# Altium PCB IRIS1-DLB3.PcbDoc
Units mil, origin at the board's own origin, x right, y up, seen from the top; angles counter-clockwise.
Board outline 3540 x 3540 mil, 4 copper layers (Top Layer, PWR, GND, Bottom Layer), stack 61.418 mil thick; 50 components, 39 nets, 446 pads, 182 vias.
Unrouted connection lines stored in the file: 9.
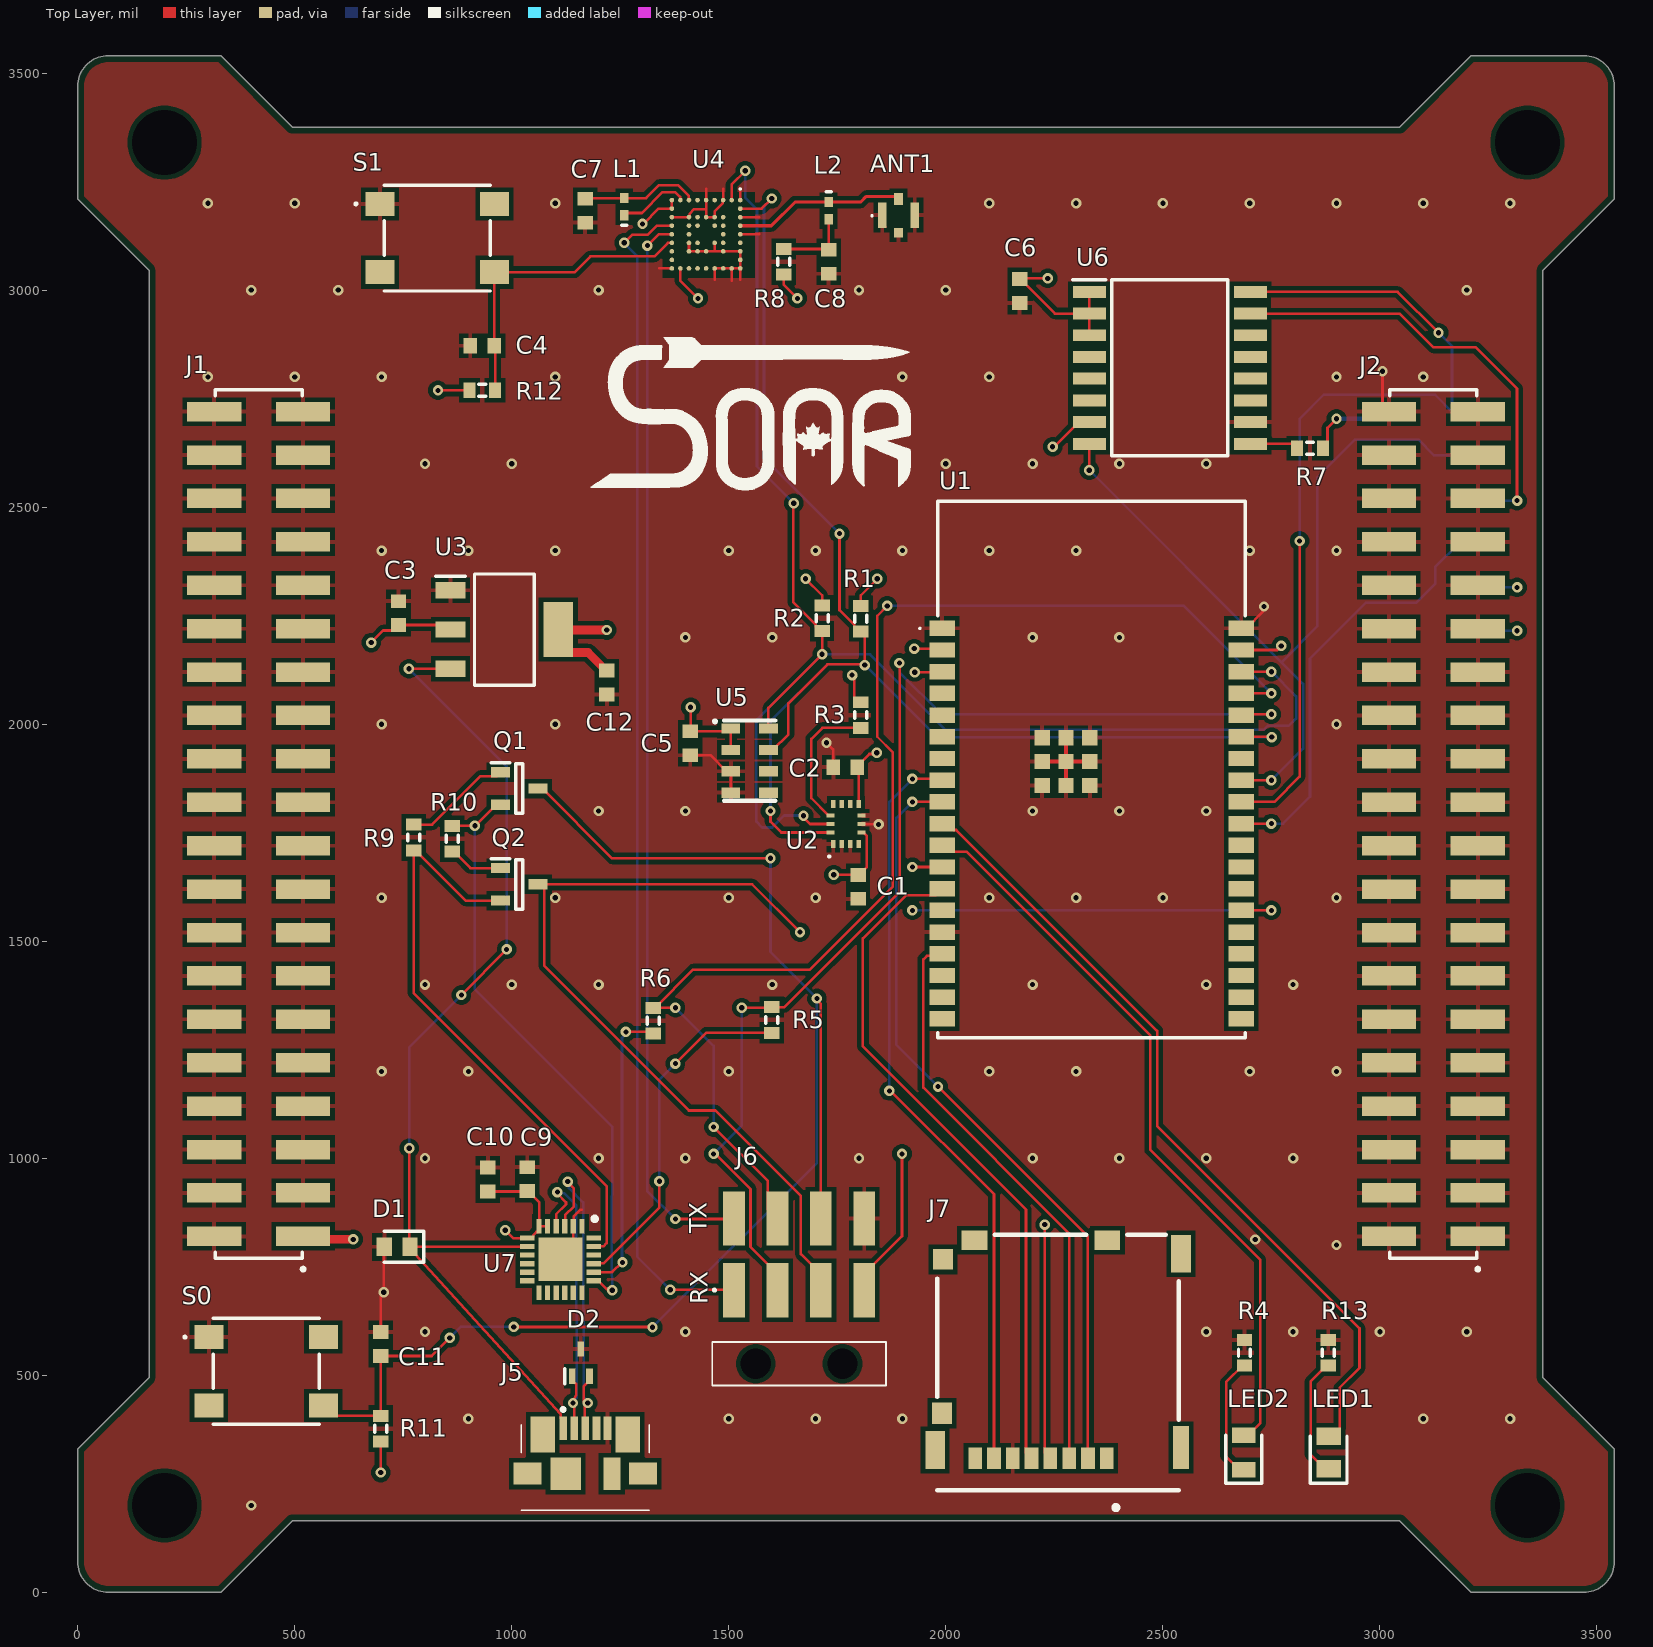
[diagram p0: Top Layer view]
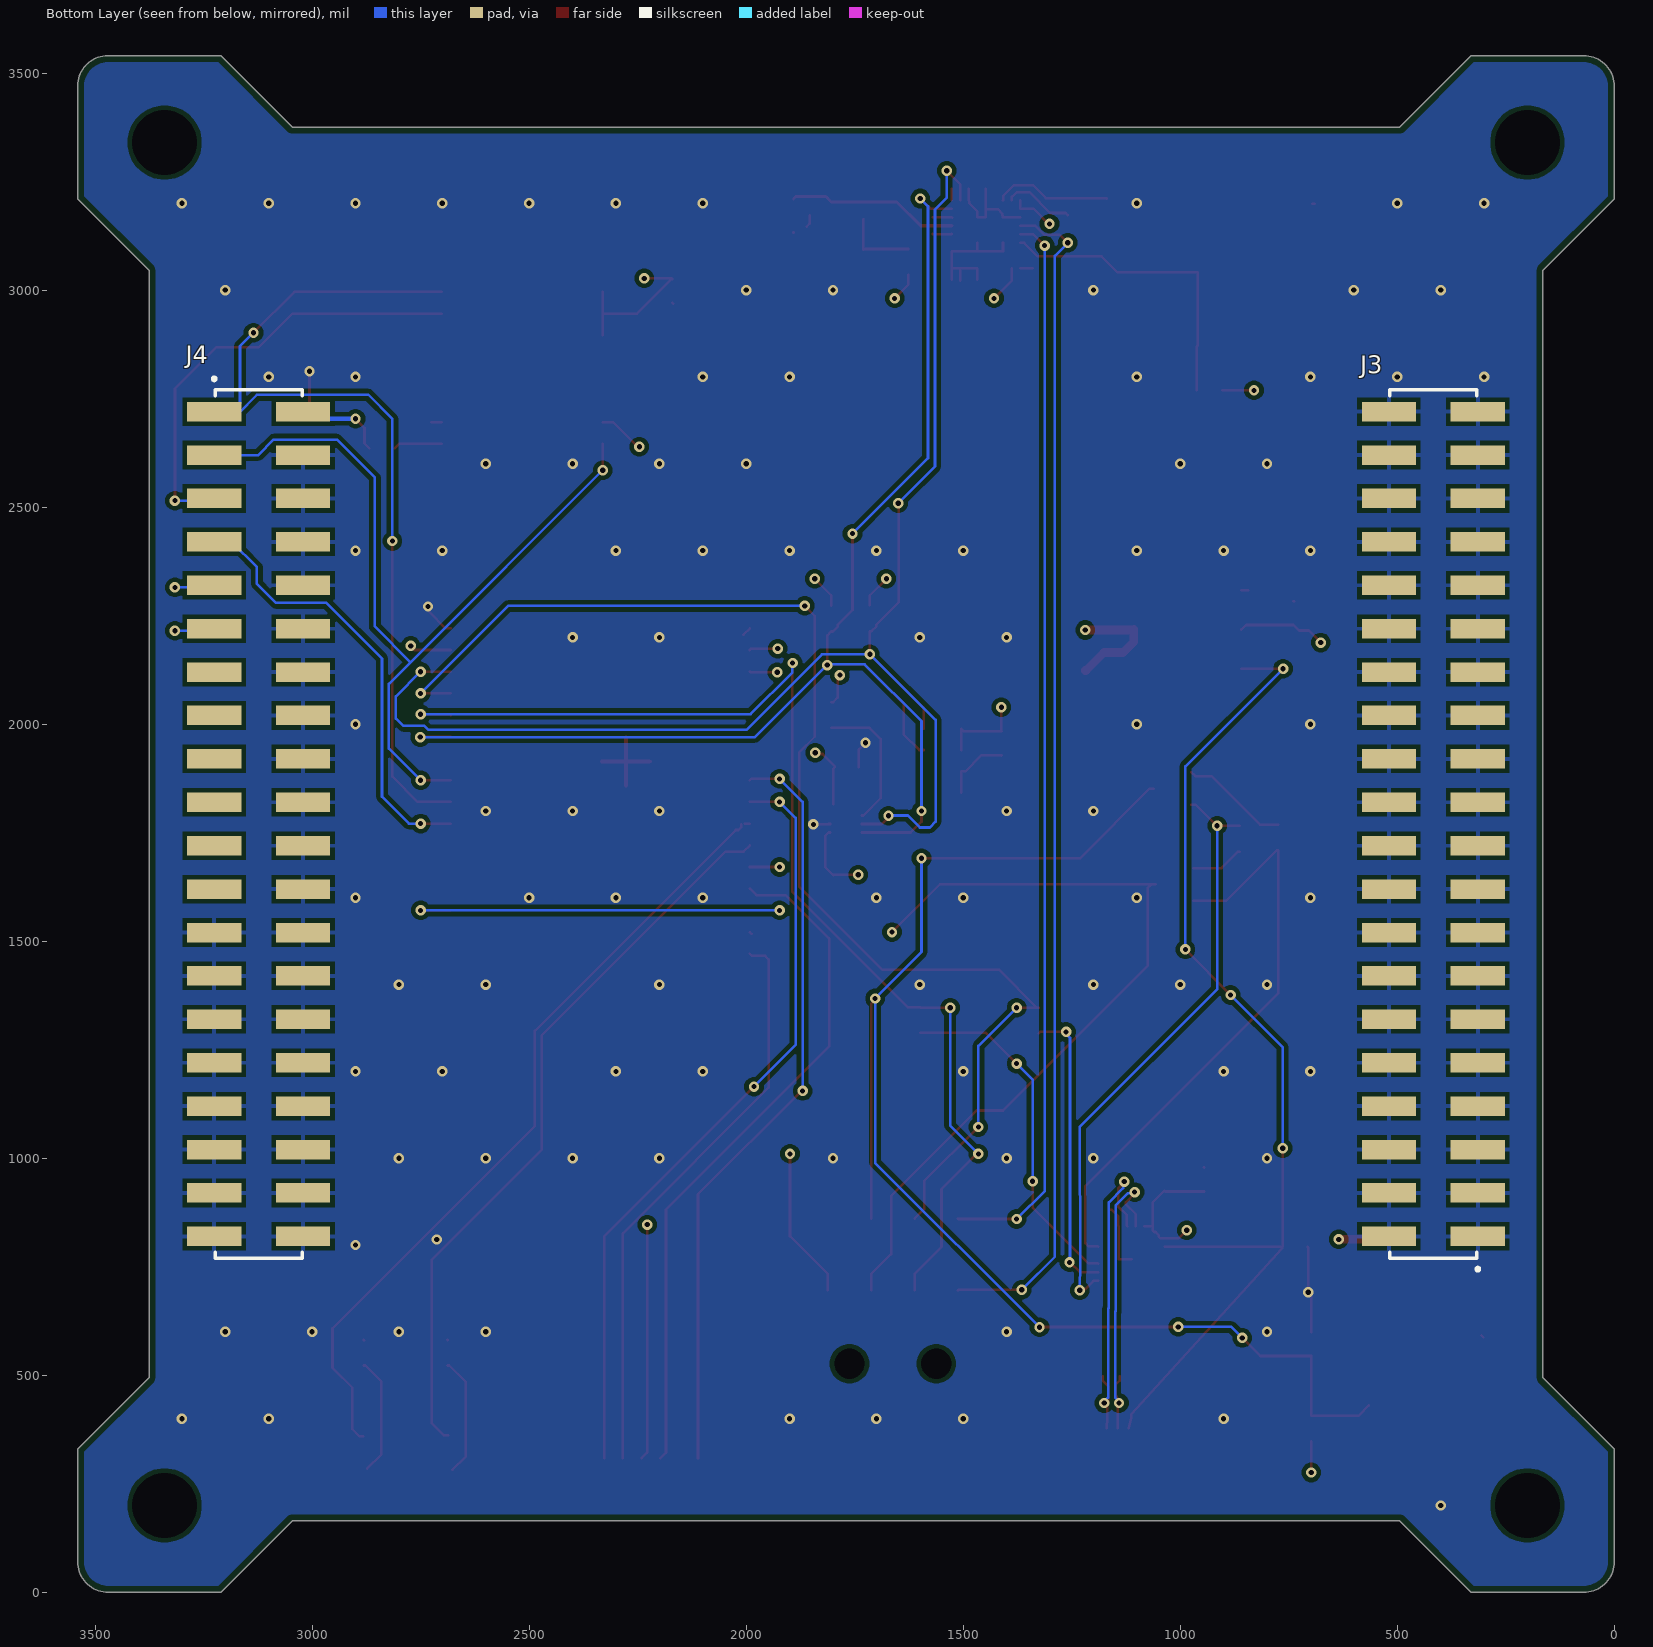
[diagram p1: Bottom Layer view, seen from below]
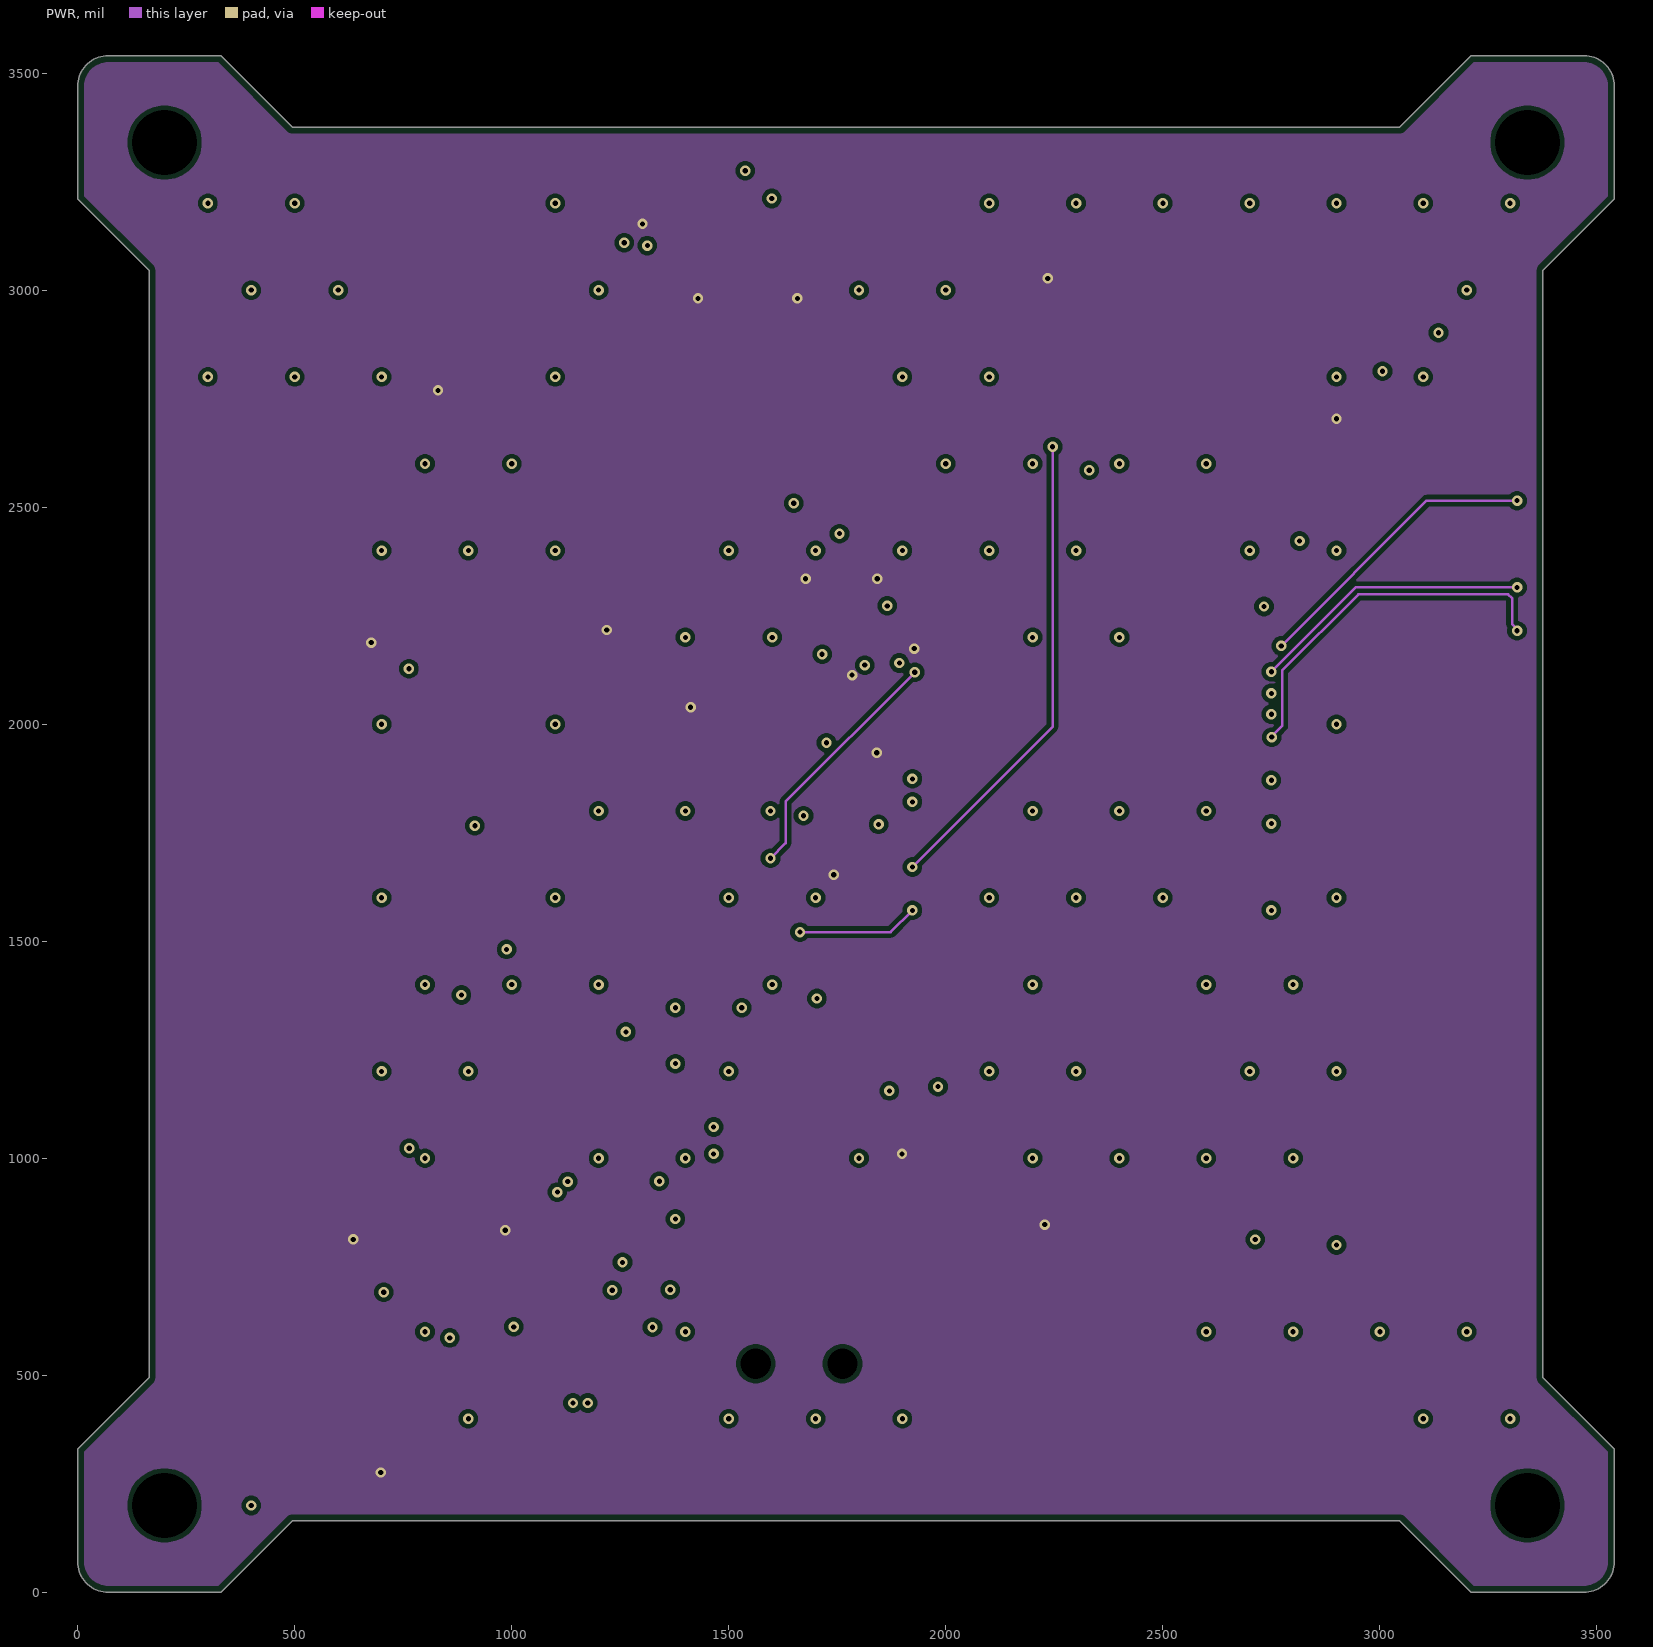
[diagram p2: PWR]
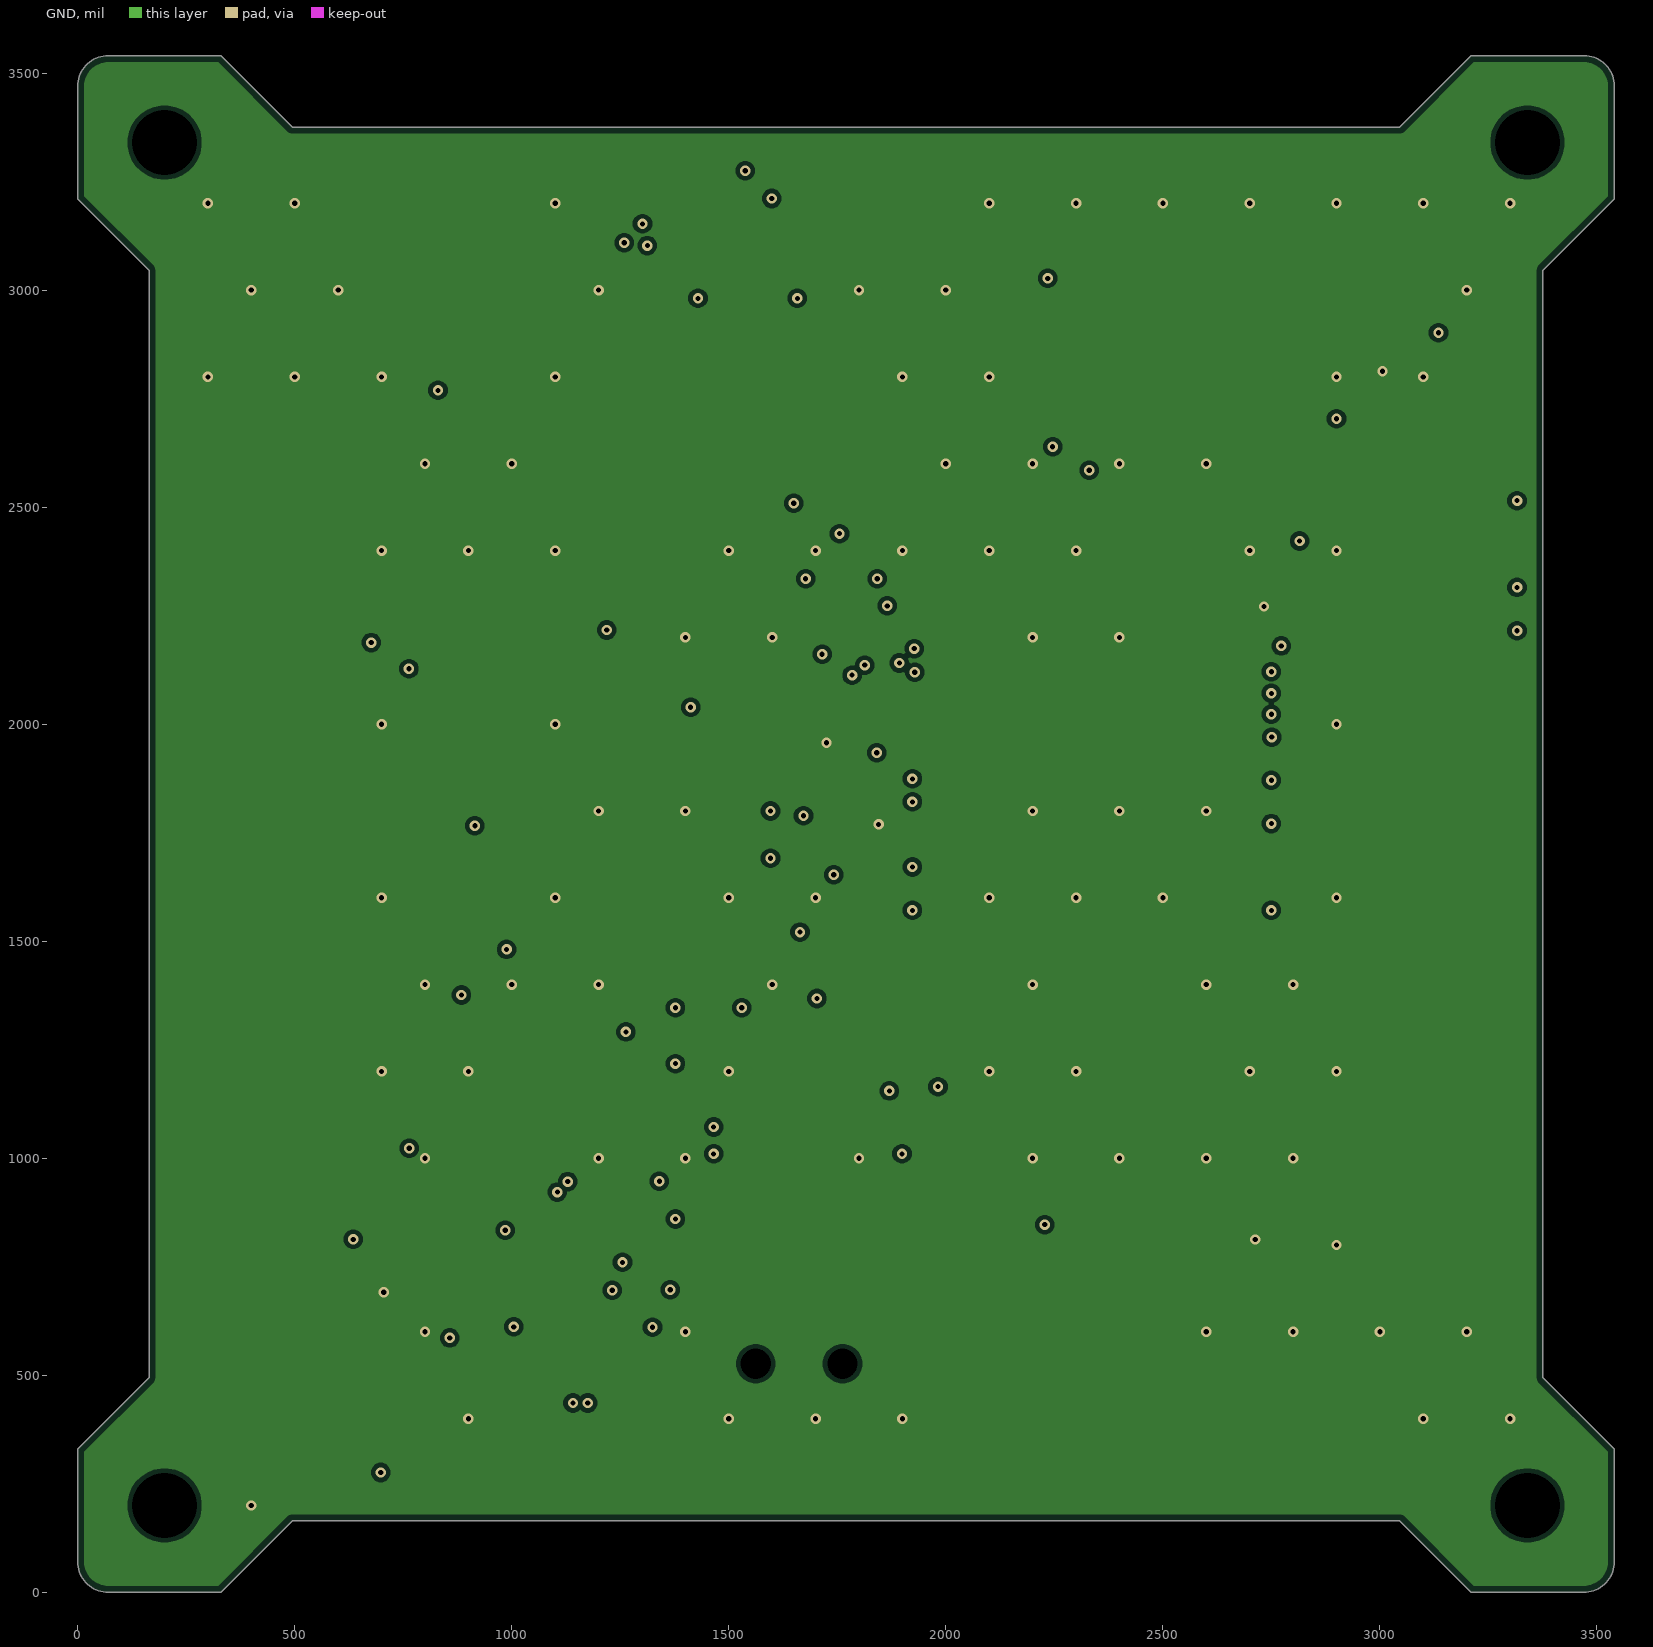
[diagram p3: GND]

## Layer stack, top to bottom
Top Solder: solder mask 0.4, Solder Resist, Dk 3.5
Top Layer: signal copper 1.378
Dielectric 2: prepreg 4.3307, PP-006, Dk 4.29
PWR: signal copper 1.378
Dielectric 1: core 47.2441, FR-4, Dk 4.6
GND: signal copper 1.378
Dielectric 3: prepreg 4.3307, PP-006, Dk 4.29
Bottom Layer: signal copper 1.378
Bottom Solder: solder mask 0.4, Solder Resist, Dk 3.5

## Board outline
0,3470 cw(c70,3470) 70,3540 330,3540 495,3375 3045,3375 3210,3540 3471,3540 cw(c3471,3471) 3540,3471 3540,3210 3375,3045 3375,495 3540,330 3540,70 cw(c3470,70) 3470,0 3210,0 3045,165 495,165 330,0 70,0 cw(c70,70) 0,70 0,330 165,495 165,3045 0,3210

## Design rules (kind name [scope] priority, off if disabled: settings)
BoardOutlineClearance [All] p1: gap=15 ignorepadtopadclearanceinfootprint=FALSE
Clearance [All] p1: gap=10 ignorepadtopadclearanceinfootprint=TRUE except(0: Arc-Hole Track-Hole SMDPad-Hole THPad-Hole Via-Hole Fill-Hole Poly-Hole Region-Hole Text-Hole)
DiffPairsRouting [All] p1: maxlimit=20 minlimit=10 mostfreqgap=10 toplayer_minwidth=6 toplayer_maxwidth=15 toplayer_prefwidth=15 midlayer1_minwidth=6 midlayer1_maxwidth=15 midlayer1_prefwidth=15 midlayer2_minwidth=6 midlayer2_maxwidth=15 midlayer2_prefwidth=15 bottomlayer_minwidth=6 bottomlayer_maxwidth=15 bottomlayer_prefwidth=15 maxuncoupledlength=500
HoleSize [All] p1: absolutevalues=TRUE maxlimit=200 minlimit=12 maxpercent=80.000 minpercent=20.000
MinimumSolderMaskSliver [All] p1: minsoldermaskwidth=5
PolygonConnect PolygonConnect_8 [All vs IsNamedPolygon('Bottom_GND')] p1: thpad.connectstyle=Relief thpad.reliefconductorwidth=10 thpad.reliefentries=4 thpad.polygonreliefangle="90 Angle" thpad.airgapwidth=10 smdpad.connectstyle=Relief smdpad.reliefconductorwidth=10 smdpad.reliefentries=4 smdpad.polygonreliefangle="90 Angle" smdpad.airgapwidth=10 via.connectstyle=Direct via.reliefconductorwidth=10 via.reliefentries=4 via.polygonreliefangle="90 Angle" via.airgapwidth=10
PolygonConnect PolygonConnect_7 [All vs IsNamedPolygon('GND_L03_P003')] p2: thpad.connectstyle=Relief thpad.reliefconductorwidth=10 thpad.reliefentries=4 thpad.polygonreliefangle="90 Angle" thpad.airgapwidth=10 smdpad.connectstyle=Relief smdpad.reliefconductorwidth=10 smdpad.reliefentries=4 smdpad.polygonreliefangle="90 Angle" smdpad.airgapwidth=10 via.connectstyle=Direct via.reliefconductorwidth=10 via.reliefentries=4 via.polygonreliefangle="90 Angle" via.airgapwidth=10
PolygonConnect PolygonConnect_6 [All vs IsNamedPolygon('3V3_PWR')] p3: thpad.connectstyle=Relief thpad.reliefconductorwidth=10 thpad.reliefentries=4 thpad.polygonreliefangle="90 Angle" thpad.airgapwidth=10 smdpad.connectstyle=Relief smdpad.reliefconductorwidth=10 smdpad.reliefentries=4 smdpad.polygonreliefangle="90 Angle" smdpad.airgapwidth=10 via.connectstyle=Direct via.reliefconductorwidth=10 via.reliefentries=4 via.polygonreliefangle="90 Angle" via.airgapwidth=10
PolygonConnect PolygonConnect_5 [All vs IsNamedPolygon('Top_GND')] p4: thpad.connectstyle=Direct thpad.reliefconductorwidth=10 thpad.reliefentries=4 thpad.polygonreliefangle="90 Angle" thpad.airgapwidth=10 smdpad.connectstyle=Relief smdpad.reliefconductorwidth=10 smdpad.reliefentries=4 smdpad.polygonreliefangle="90 Angle" smdpad.airgapwidth=10 via.connectstyle=Direct via.reliefconductorwidth=10 via.reliefentries=4 via.polygonreliefangle="45 Angle" via.airgapwidth=10
PolygonConnect PolygonConnect_4 [All vs IsNamedPolygon('Bottom_GND')] p5: thpad.connectstyle=Direct thpad.reliefconductorwidth=10 thpad.reliefentries=4 thpad.polygonreliefangle="90 Angle" thpad.airgapwidth=10 smdpad.connectstyle=Relief smdpad.reliefconductorwidth=10 smdpad.reliefentries=4 smdpad.polygonreliefangle="90 Angle" smdpad.airgapwidth=10 via.connectstyle=Relief via.reliefconductorwidth=10 via.reliefentries=4 via.polygonreliefangle="90 Angle" via.airgapwidth=10
PolygonConnect PolygonConnect_3 [All vs IsNamedPolygon('GND_L03_P003')] p6: thpad.connectstyle=Direct thpad.reliefconductorwidth=10 thpad.reliefentries=4 thpad.polygonreliefangle="90 Angle" thpad.airgapwidth=10 smdpad.connectstyle=Relief smdpad.reliefconductorwidth=10 smdpad.reliefentries=4 smdpad.polygonreliefangle="90 Angle" smdpad.airgapwidth=10 via.connectstyle=Relief via.reliefconductorwidth=10 via.reliefentries=4 via.polygonreliefangle="90 Angle" via.airgapwidth=10
PolygonConnect PolygonConnect_2 [All vs IsNamedPolygon('3V3_PWR')] p7: thpad.connectstyle=Direct thpad.reliefconductorwidth=10 thpad.reliefentries=4 thpad.polygonreliefangle="90 Angle" thpad.airgapwidth=10 smdpad.connectstyle=Relief smdpad.reliefconductorwidth=10 smdpad.reliefentries=4 smdpad.polygonreliefangle="90 Angle" smdpad.airgapwidth=10 via.connectstyle=Relief via.reliefconductorwidth=10 via.reliefentries=4 via.polygonreliefangle="90 Angle" via.airgapwidth=10
PolygonConnect PolygonConnect_1 [All vs IsNamedPolygon('Top_GND')] p8: thpad.connectstyle=Direct thpad.reliefconductorwidth=10 thpad.reliefentries=4 thpad.polygonreliefangle="90 Angle" thpad.airgapwidth=10 smdpad.connectstyle=Relief smdpad.reliefconductorwidth=10 smdpad.reliefentries=4 smdpad.polygonreliefangle="90 Angle" smdpad.airgapwidth=10 via.connectstyle=Relief via.reliefconductorwidth=10 via.reliefentries=4 via.polygonreliefangle="90 Angle" via.airgapwidth=10
PolygonConnect [All] p9: connectstyle=Relief reliefconductorwidth=10 reliefentries=4 polygonreliefangle="90 Angle" airgapwidth=10
RoutingVias [All] p1: holewidth=28 width=50 viastyle="Through Hole" minholewidth=10 minwidth=20 maxholewidth=28 maxwidth=50
SilkToSolderMaskClearance [IsPad] p1: minsilkscreentomaskgap=1 clearancetoexposedcopper=TRUE
SolderMaskExpansion SolderMaskExpansion_1 [InPadClass('All Pads')] p1: expansion=2 istentingtop=FALSE
SolderMaskExpansion [All] p2: expansion=2 istentingtop=TRUE
Width Width_1 [All] p1: maxlimit=20 minlimit=6 preferedwidth=10 minimp=50.000000 maximp=50.000000 favimp=50.000000
Width RF [InNetClass('RF')] p2: maxlimit=20 minlimit=6 preferedwidth=10 minimp=50.000000 maximp=50.000000 favimp=50.000000 // RF Impedance
26 further rules are at their usual default settings.

## Classes and differential pairs
polygon class Top_GND: GND_L03_P003
net class RF: RF_IN
component class IRIS1-DLB: ANT1 C1 C2 C3 C4 C5 C6 C7 C8 C9 C10 C11 C12 D1 D2 J1 J3 J5 J6 J7 L1 L2 LED1 LED2 Q1 Q2 R1 R2 R3 R4 R5 R6 R7 R8 R9 R10 R11 R12 R13 S0 S1 U2 U3 U4 U5 U6 U7
differential pair D: +D_P -D_N

## Components (designator, comment, footprint, x,y, rotation, side; value= is the part's Value field where it differs from the comment)
ANT1 "RECE.20369.001E.01" RECE20369001E01 1891,3171.42 r0 top
C1 "0.1uF" 1608[0603] 1798,1625 r90 top
C2 "0.1uF" 1608[0603] 1768.03,1901 r0 top
C3 "22uF" 1608[0603] 739,2256 r270 top value=0.1uF
C4 "0.1uF" 1608[0603] 932,2872 r0 top
C5 "0.1uF" 1608[0603] 1411,1956 r90 top
C6 "0.1uF" 1608[0603] 2170,2998 r90 top
C7 "4.7uF" 1608[0603] 1169,3183 r90 top value=0.1uF
C8 "0.01uF" 1608[0603] 1729.88,3065.3 r90 top value=0.1uF
C9 "0.1uF" 1608[0603] 1035.46,952 r270 top
C10 "4.7uF" 1608[0603] 945,951 r270 top value=0.1uF
C11 "0.1uF" 1608[0603] 698,572 r270 top
C12 "22uF" 1608[0603] 1219,2096 r90 top value=0.1uF
D1 "UCLAMP0571P.TNT" DIOC1610X55N 736,796 r180 top
D2 "RCLAMP0582BQTCT" SOT50P160X90-3N 1159,529 r90 top
J1 "HW-23-15-F-D-330-SM" SAMTEC_HW-20-16-F-D-250-SM 519.26,820 r90 top
J2 "HW-23-15-F-D-330-SM" SAMTEC_HW-20-16-F-D-250-SM 3225.66,820 r90 top
J3 "HW-20-16-F-D-250-SM" SAMTEC_HW-20-16-F-D-250-SM 314.34,820 r90 bottom
J4 "HW-20-16-F-D-250-SM" SAMTEC_HW-20-16-F-D-250-SM 3225.66,2720 r270 bottom
J5 "47346-1001" 473461001 1169.41,303.08 r0 top
J6 "TSM-104-02-F-DH-A-P-TR" TSM-104-ZZ-YYY-DH-A-P-TR 1662,778.48 r180 top
J7 "503182-1852" 5031821852 2258.52,333.64 r180 top
L1 "2.2uH" 0402-A 1259,3192.31 r90 top value=10mH
L2 "47nH" 0402-A 1729.88,3183.23 r270 top value=10mH
LED1 "APTD2012LQBC_D" LEDC2012X120N 2882,322 r90 top
LED2 "APTD2012LZGCK" LEDC2012X105N 2686.3,322 r90 top
Q1 "SS8050-G" SOT95P240X115-3N 1017.31,1851.6 r0 top
Q2 "SS8050-G" SOT95P240X115-3N 1017,1631 r0 top
R1 "10K" J1-0603 1804,2243 r90 top value=1K
R2 "10K" J1-0603 1715,2244 r90 top value=1K
R3 "10K" J1-0603 1804,2020.97 r90 top value=1K
R4 "800" J1-0603 2688,552 r90 top value=1K
R5 "0R" J1-0603 1599,1318.47 r270 top value=1K
R6 "0R" J1-0603 1326,1317 r270 top value=1K
R7 "10K" J1-0603 2839,2636 r180 top value=1K
R8 "10" J1-0603 1627,3065.3 r90 top value=1K
R9 "10K" J1-0603 774,1739 r90 top value=1K
R10 "10K" J1-0603 863,1736 r270 top value=1K
R11 "10K" J1-0603 698,377 r270 top value=1K
R12 "10K" J1-0603 932,2769 r180 top value=1K
R13 "175" J1-0603 2881,552 r90 top value=1K
S0 "430473035826" 430473035826 434,509 r0 top
S1 "430473035826" 430473035826 828,3120 r0 top
U1 "ESP32-WROVER-E-N16R8" ESP32WROVEREN16R8 2335.94,1895.77 r0 top
U2 "LSM6DSO32TR" LGA-14(2.5X3X0.86) 1770,1770 r90 top locked
U3 "TLV1117-33CDCYRG3" SOT230P700X180-4N 983,2218 r0 top
U4 "ZOE-M8Q-0" ZOEM8Q0 1447.63,3128.69 r270 top
U5 "MS561101BA03-50" MS561101BA03-50 1548,1916 r0 top
U6 "W25Q128JVFIQ" SOIC127P1032X264-16N 2516,2821 r0 top
U7 "CP2102N-A02-GQFN24" QFN50P400X400X80-25N-D 1112.23,766.84 r270 top

## Footprints (in the part's own frame and the unit in brackets; to place one, negate y for a bottom-side part, rotate by r counter-clockwise, add the part's x,y. Pads: shape width x height; smd on the part's side, far side on the other; paste and mask are expansions set on the pad)
0402-A [mm] "Chip Inductor, Body 1.0x0.5mm, IPC High Density"
  rect 0.6x0.5 smd: 1(-0.5,0) 2(0.5,0)
  silkscreen extent -1.1,-0.15 -1.1,0.15, body extent -0.55,-0.3 0.55,0.3, height 0.55
1608[0603] [mm] "Chip Capacitor, Body 1.6x0.8mm, IPC High Density"
  rect 0.8x0.9 smd: 1(-0.7,0) 2(0.7,0)
  body extent -0.87,-0.48 0.87,0.48, height 1.3
473461001 [mm]
  rect 0.45x1.38 smd mask+0.152: 1(-1.3,1.903) 2(-0.65,1.903) 3(0,1.903) 4(0.65,1.903) 5(1.3,1.903)
  rect 1.425x2.1 smd mask+0.152: 6(2.487,1.544) 7(-2.487,1.544)
  rect 1.8x1.9 smd paste+0 mask+0.178: 8(-1.15,-0.756)
  rect 1x1.9 smd mask+0.178: 9(1.55,-0.756)
  rect 1.65x1.3 smd: 10(-3.375,-0.756) 11(3.375,-0.756)
  silkscreen extent -3.75,-2.91 3.75,3.1, body extent -3.9,-2.85 3.9,2.15, height 2.72
5031821852 [mm]
  rect 0.8x1.24 smd: 1(-2.85,0.63) 2(-1.75,0.63) 3(-0.65,0.63) 4(0.45,0.63) 5(1.55,0.63) 6(2.65,0.63) 7(3.75,0.63) 8(4.85,0.63)
  rect 0.95x2.5 smd: 9(-7.195,0)
  rect 1.15x2.2 smd: 10(7.195,0.15) 15(-7.195,-11.33)
  rect 1.16x1.25 smd: 11(6.795,-2)
  rect 1.16x1.2 smd: 12(6.74,-11)
  rect 1.5x1.15 smd: 13(4.89,-12.125) 14(-2.89,-12.125)
  silkscreen extent -7.07,-12.45 7.07,3.66, body extent -7.47,-12.4 7.47,2.55, height 1.51
430473035826 [mm]
  rect 1.7x1.4 smd: 1(-3.35,2) 2(3.35,2) 3(-3.35,-2) 4(3.35,-2)
  silkscreen extent -4.8,-3.1 3.1,3.1, body extent -4.06,-3.1 4.06,3.1, height 3.8
DIOC1610X55N [mm]
  rect 0.9x1.1 smd: 1(-0.75,0) 2(0.75,0)
  silkscreen extent -1.55,-0.9 0.75,0.9, body extent -0.8,-0.5 0.8,0.5, height 0.55
ESP32WROVEREN16R8 [mm]
  rect 1.5x0.9 smd: 1(-8.75,8.26) 2(-8.75,6.99) 3(-8.75,5.72) 4(-8.75,4.45) 5(-8.75,3.18) 6(-8.75,1.91) 7(-8.75,0.64) 8(-8.75,-0.63) 9(-8.75,-1.9) 10(-8.75,-3.17) 11(-8.75,-4.44) 12(-8.75,-5.71) 13(-8.75,-6.98) 14(-8.75,-8.25) 15(-8.75,-9.52) 16(-8.75,-10.79) 17(-8.75,-12.06) 18(-8.75,-13.33) 19(-8.75,-14.6) 20(8.75,-14.6) 21(8.75,-13.33) 22(8.75,-12.06) 23(8.75,-10.79) 24(8.75,-9.52) 25(8.75,-8.25) 26(8.75,-6.98) 27(8.75,-5.71) 28(8.75,-4.44) 29(8.75,-3.17) 30(8.75,-1.9) 31(8.75,-0.63) 32(8.75,0.64) 33(8.75,1.91) 34(8.75,3.18) 35(8.75,4.45) 36(8.75,5.72) 37(8.75,6.99) 38(8.75,8.26)
  rect 0.9x0.9 smd: 39(-1.5,0.46) 40(-2.9,-0.94) 41(-1.5,-0.94) 42(-0.1,-0.94) 43(-0.1,0.46) 44(-0.1,1.86) 45(-1.5,1.86) 46(-2.9,1.86) 47(-2.9,0.46)
  silkscreen extent -10.1,-15.7 9,15.7, body extent -9,-15.7 9,15.7, height 3.55
J1-0603 [mm] "Chip Resistor, Body 1.6x0.8mm, IPC High Density"
  rect 0.7x0.9 smd: 1(-0.75,0) 2(0.75,0)
  silkscreen extent -0.2,-0.35 0.2,0.35, body extent -0.85,-0.48 0.85,0.48, height 0.9
LEDC2012X105N [mm]
  rect 0.9x1.4 smd: 1(-1,0) 2(1,0)
  silkscreen extent -1.8,-1.05 1,1.05, body extent -1.03,-0.63 0.97,0.63, height 1.05
LEDC2012X120N [mm]
  rect 1x1.45 smd: 1(-0.95,0) 2(0.95,0)
  silkscreen extent -1.8,-1.07 0.95,1.07
LGA-14(2.5X3X0.86) [mm]
  rect 0.475x0.25 smd: 1(-1.162,0.75) 2(-1.162,0.25) 3(-1.162,-0.25) 4(-1.162,-0.75) 8(1.162,-0.75) 9(1.162,-0.25) 10(1.162,0.25) 11(1.162,0.75)
  rect 0.25x0.475 smd: 5(-0.5,-0.913) 6(0,-0.913) 7(0.5,-0.913) 12(0.5,0.913) 13(0,0.913) 14(-0.5,0.913)
  silkscreen extent -1.93,0.95 -1.88,1.01, body extent -1.5,-1.25 1.5,1.25, height 0.86
MS561101BA03-50 [mm]
  rect 1.1x0.6 smd: 1(-1.1,1.875) 2(-1.1,0.625) 3(-1.1,-0.625) 4(-1.1,-1.875) 5(1.1,-1.875) 6(1.1,-0.625) 7(1.1,0.625) 8(1.1,1.875)
  silkscreen extent -2.08,-2.35 1.5,2.35, body extent -1.5,-2.5 1.5,2.5, height 0.95
QFN50P400X400X80-25N-D [mm]
  rect 0.85x0.3 smd mask+0.127: 1(-1.95,1.25) 2(-1.95,0.75) 3(-1.95,0.25) 4(-1.95,-0.25) 5(-1.95,-0.75) 6(-1.95,-1.25) 13(1.95,-1.25) 14(1.95,-0.75) 15(1.95,-0.25) 16(1.95,0.25) 17(1.95,0.75)
  rect 0.3x0.85 smd mask+0.127: 7(-1.25,-1.95) 8(-0.75,-1.95) 9(-0.25,-1.95) 10(0.25,-1.95) 11(0.75,-1.95) 12(1.25,-1.95) 19(1.25,1.95) 20(0.75,1.95) 21(0.25,1.95) 22(-0.25,1.95) 23(-0.75,1.95) 24(-1.25,1.95)
  rect 0.85x0.3 smd paste+0 mask+0.127: 18(1.95,1.25)
  rect 2.55x2.55 smd mask+0.152: 25(0,0)
  silkscreen extent -2.5,1.88 -2.25,2.13, body extent -2.05,-2.05 2.05,2.05, height 0.8
RECE20369001E01 [mm]
  rect 0.5x1.5 smd: 1(-0.95,0.037) 3(0.95,0.037)
  rect 0.5x0.55 smd: 2(0,-0.987)
  rect 0.5x0.7 smd: 4(0,0.987)
  silkscreen extent -1.6,-0.05 -1.5,0.05, body extent -1.15,-1.21 1.15,1.29, height 1.15
SAMTEC_HW-20-16-F-D-250-SM [mm]
  rect 1.14x3.175 smd: 01(0,0) 02(0,5.205) 03(2.54,0) 04(2.54,5.205) 05(5.08,0) 06(5.08,5.205) 07(7.62,0) 08(7.62,5.205) 09(10.16,0) 10(10.16,5.205) 11(12.7,0) 12(12.7,5.205) 13(15.24,0) 14(15.24,5.205) 15(17.78,0) 16(17.78,5.205) 17(20.32,0) 18(20.32,5.205) 19(22.86,0) 20(22.86,5.205) 21(25.4,0) 22(25.4,5.205) 23(27.94,0) 24(27.94,5.205) 25(30.48,0) 26(30.48,5.205) 27(33.02,0) 28(33.02,5.205) 29(35.56,0) 30(35.56,5.205) 31(38.1,0) 32(38.1,5.205) 33(40.64,0) 34(40.64,5.205) 35(43.18,0) 36(43.18,5.205) 37(45.72,0) 38(45.72,5.205) 39(48.26,0) 40(48.26,5.205)
  silkscreen extent -2.02,-0.1 49.53,5.14
SOIC127P1032X264-16N [mm]
  rect 1.93x0.7 smd: 1(-4.71,4.445) 2(-4.71,3.175) 3(-4.71,1.905) 4(-4.71,0.635) 5(-4.71,-0.635) 6(-4.71,-1.905) 7(-4.71,-3.175) 8(-4.71,-4.445) 9(4.71,-4.445) 10(4.71,-3.175) 11(4.71,-1.905) 12(4.71,-0.635) 13(4.71,0.635) 14(4.71,1.905) 15(4.71,3.175) 16(4.71,4.445)
  silkscreen extent -5.68,-5.14 3.39,5.15, body extent -5.16,-5.14 5.16,5.14, height 2.64
SOT50P160X90-3N [mm]
  rect 0.9x0.4 smd: 1(-0.8,0.5) 2(-0.8,-0.5) 3(0.8,0)
  silkscreen extent -1.25,0.95 -0.35,0.95, body extent -0.8,-0.8 0.8,0.8, height 0.9
SOT95P240X115-3N [mm]
  rect 1.1x0.6 smd: 1(-1.1,0.95) 2(-1.1,-0.95) 3(1.1,0)
  silkscreen extent -1.65,-1.45 0.2,1.5, body extent -1.2,-1.45 1.2,1.45, height 1.15
SOT230P700X180-4N [mm]
  rect 1.75x0.95 smd: 1(-3.15,2.3) 2(-3.15,0) 3(-3.15,-2.3)
  rect 1.75x3.2 smd: 4(3.15,0)
  silkscreen extent -4.03,-3.25 1.75,3.25, body extent -3.5,-3.25 3.5,3.25, height 1.68
TSM-104-ZZ-YYY-DH-A-P-TR [mm]
  rect 1.27x3.18 smd: 1(3.81,2.095) 2(3.81,-2.095) 3(1.27,2.095) 4(1.27,-2.095) 5(-1.27,2.095) 6(-1.27,-2.095) 7(-3.81,2.095) 8(-3.81,-2.095)
  round 0.89 hole 1.78 unplated mask+0.254: 9(2.54,6.4) 10(-2.54,6.4)
  silkscreen extent -5.08,2.05 5.08,7.67
ZOEM8Q0 [mm]
  round 0.27 smd: A1(-2,2) A2(-1.5,2) A3(-1,2) A4(-0.5,2) A5(0,2) A6(0.5,2) A7(1,2) A8(1.5,2) A9(2,2) B1(-2,1.5) B9(2,1.5) C1(-2,1) C3(-1,1) C4(-0.5,1) C5(0,1) C6(0.5,1) C7(1,1) C9(2,1) D1(-2,0.5) D3(-1,0.5) D4(-0.5,0.5) D6(0.5,0.5) D9(2,0.5) E1(-2,0) E3(-1,0) E7(1,0) E9(2,0) F1(-2,-0.5) F3(-1,-0.5) F4(-0.5,-0.5) F6(0.5,-0.5) F7(1,-0.5) F9(2,-0.5) G1(-2,-1) G3(-1,-1) G4(-0.5,-1) G5(0,-1) G6(0.5,-1) G7(1,-1) G9(2,-1) H1(-2,-1.5) H9(2,-1.5) J1(-2,-2) J2(-1.5,-2) J3(-1,-2) J4(-0.5,-2) J5(0,-2) J6(0.5,-2) J7(1,-2) J8(1.5,-2) J9(2,-2)
  silkscreen extent -2.7,1.95 -2.6,2.05, body extent -2.25,-2.25 2.25,2.25, height 1.26

## Part data
ANT1: "Antenna", Manufacturer_Name=Taoglas, Mouser Part Number=960-RECE.20369001E01, Datasheet Link=https://cdn.taoglas.com/datasheets/RECE.20369.001E.01.pdf, Height=1.05mm, Manufacturer_Part_Number=RECE.20369.001E.01, Mouser Price/Stock=https://www.mouser.co.uk/ProductDetail/Taoglas/RECE.20369.001E.01?qs=DRkmTr78QATTXEmgGw9Tjg%3D%3D
C1 C2 C3 C4 C5 C6 C7 C8 C9 C10 C11 C12: library part Cap, "Capacitor", LatestRevisionDate=17-Jul-2002, LatestRevisionNote="Re-released for DXP Platform.", PackageDescription="Radial Cap, Thru-Hole; 2 Leads; 0.3 in Pin Spacing", PackageReference=RAD-0.3, Published=8-Jun-2000, Publisher="Altium Limited"
D1: "TVS Diode (Uni-directional)", Manufacturer_Name=SEMTECH, Mouser Part Number=947-UCLAMP0571P.TNT, Arrow Part Number=UCLAMP0571P.TNT, Arrow Price/Stock=https://www.arrow.com/en/products/uclamp0571p.tnt/semtech?region=europe, Datasheet Link=https://www.mouser.com/datasheet/2/761/uClampxx71P-1360280.pdf, Height=0.55mm, Manufacturer_Part_Number=UCLAMP0571P.TNT, Mouser Price/Stock=https://www.mouser.co.uk/ProductDetail/Semtech/UCLAMP0571PTNT?qs=rBWM4%252BvDhIdABRCK070WwQ%3D%3D
D2: "TVS Diode (Uni-directional)", Manufacturer_Name=SEMTECH, Mouser Part Number=947-RCLAMP0582BQTCT, Arrow Part Number=RCLAMP0582BQTCT, Arrow Price/Stock=https://www.arrow.com/en/products/rclamp0582bqtct/semtech?region=nac, Datasheet Link=https://datasheet.datasheetarchive.com/originals/distributors/Datasheets-DGA21/1852579.pdf, Height=0.9mm, Manufacturer_Part_Number=RCLAMP0582BQTCT, Mouser Price/Stock=https://www.mouser.co.uk/ProductDetail/Semtech/RCLAMP0582BQTCT?qs=rBWM4%252BvDhIdyuNQteOG89g%3D%3D
J1 J2: library part HW-20-XX-XX-D-XXX-XXX, Package=None, Availability="Not in stock", Check_prices=https://www.snapeda.com/parts/HW-20-08-G-D-350-100/Samtec/view-part/?ref=eda, MF=Samtec, MP=HW-20-08-G-D-350-100, Price=None, SnapEDA_Link=https://www.snapeda.com/parts/HW-20-08-G-D-350-100/Samtec/view-part/?ref=snap
J3 J4: Package=None, Availability=Unavailable, MP=HW-20-16-F-D-250-SM, Price=None
J5: "Connector", Manufacturer_Name=Molex, Mouser Part Number=538-47346-1001, Arrow Part Number=47346-1001, Arrow Price/Stock=https://www.arrow.com/en/products/47346-1001/molex?region=nac, Datasheet Link=http://www.molex.com/webdocs/datasheets/pdf/en-us/0473461001_IO_CONNECTORS.pdf, Height=2.94mm, Manufacturer_Part_Number=47346-1001, Mouser Price/Stock=https://www.mouser.co.uk/ProductDetail/Molex/47346-1001?qs=yd8XiKYcH9muPqUKe4E0Dw%3D%3D
J6: "Connector", Manufacturer_Name=SAMTEC, Datasheet Link=http://suddendocs.samtec.com/prints/tsm-1xx-xx-xxx-xx-xx-xxx-xx-mkt1.pdf, Manufacturer_Part_Number=TSM-104-02-F-DH-A-P-TR
J7: "Connector", Manufacturer_Name=Molex, Mouser Part Number=538-503182-1852, Datasheet Link=https://www.molex.com/pdm_docs/sd/5031821852_sd.pdf, Manufacturer_Part_Number=503182-1852, Mouser Price/Stock=https://www.mouser.co.uk/ProductDetail/Molex/503182-1852?qs=s7UCm7gO1bZmpyAhCKZ26g%3D%3D
L1 L2: library part Inductor, "Inductor", Code_IEC=1005, Code_JEITA=0402, LatestRevisionDate=29-May-2009, LatestRevisionNote="IPC-7351 Footprint Added.", PackageDescription="Chip Inductor", PackageReference=0402-A, Published=8-Jun-2000, Publisher="Altium Limited"
LED1: "LED", Arrow Part Number=APTD2012LQBC/D, Manufacturer_Name=Kingbright, Mouser Part Number=604-APTD2012LQBCD, Arrow Price/Stock=https://www.arrow.com/en/products/aptd2012lqbcd/kingbright, Datasheet Link=https://componentsearchengine.com/Datasheets/1/APTD2012LQBC_D.pdf, Height=1.2mm, Manufacturer_Part_Number=APTD2012LQBC/D, Mouser Price/Stock=https://www.mouser.co.uk/ProductDetail/Kingbright/APTD2012LQBC-D?qs=AQlKX63v8RvDGqprk6aUCg%3D%3D
LED2: "LED", Manufacturer_Name=Kingbright, Mouser Part Number=604-APTD2012LZGCK, Arrow Part Number=APTD2012LZGCK, Arrow Price/Stock=https://www.arrow.com/en/products/aptd2012lzgck/kingbright?region=nac, Datasheet Link=http://www.kingbrightusa.com/images/catalog/SPEC/APTD2012LZGCK.pdf, Height=1.05mm, Manufacturer_Part_Number=APTD2012LZGCK, Mouser Price/Stock=https://www.mouser.co.uk/ProductDetail/Kingbright/APTD2012LZGCK?qs=AQlKX63v8RvUnlqpSGhMeA%3D%3D
Q1 Q2: "Transistor BJT NPN", Manufacturer_Name="Comchip Technology", Mouser Part Number=750-SS8050-G, Arrow Part Number=SS8050-G, Arrow Price/Stock=https://www.arrow.com/en/products/ss8050-g/comchip-technology?region=nac, Datasheet Link=https://datasheet.datasheetarchive.com/originals/distributors/DKDS-12/229454.pdf, Height=1.15mm, Manufacturer_Part_Number=SS8050-G, Mouser Price/Stock=https://www.mouser.co.uk/ProductDetail/Comchip-Technology/SS8050-G?qs=LLUE9lz1YbcHg%252BWLMAtcrQ%3D%3D
R1 R2 R3 R4 R5 R6 R7 R8 R9 R10 R11 R12 R13: library part Res3, "Resistor", LatestRevisionDate=29-May-2009, LatestRevisionNote="IPC-7351 Footprint Added.", PackageDescription="Chip Resistor", PackageReference=J1-0603, Published=8-Jun-2000, Publisher="Altium Limited"
S0 S1: "Switch", Manufacturer_Name="Wurth Elektronik", Mouser Part Number=710-430473035826, Datasheet Link=https://componentsearchengine.com/Datasheets/2/430473035826.pdf, Height=3.7mm, Manufacturer_Part_Number=430473035826, Mouser Price/Stock=https://www.mouser.co.uk/ProductDetail/Wurth-Elektronik/430473035826?qs=wr8lucFkNMX7XPiy2wLoYQ%3D%3D
U1: "Integrated Circuit", Manufacturer_Name="Espressif Systems", Mouser Part Number=356-ESP32WRVE22864PC, Datasheet Link=https://www.espressif.com/sites/default/files/documentation/esp32-wrover-e_esp32-wrover-ie_datasheet_en.pdf, Height=3.45mm, Manufacturer_Part_Number=ESP32-WROVER-E-N16R8, Mouser Price/Stock=https://www.mouser.co.uk/ProductDetail/Espressif-Systems/ESP32-WROVER-E-N16R8?qs=Li%252BoUPsLEnsfUZ%252By2eNF6g%3D%3D
U2: library part LSM6DSOTR, "Accelerometer", Manufacturer_Name=STMicroelectronics, Mouser Part Number=511-LSM6DSOTR, Arrow Part Number=LSM6DSOTR, Arrow Price/Stock=https://www.arrow.com/en/products/lsm6dsotr/stmicroelectronics, Datasheet Link=https://www.st.com/resource/en/datasheet/lsm6dso.pdf, Manufacturer_Part_Number=LSM6DSOTR, Mouser Price/Stock=https://www.mouser.co.uk/ProductDetail/STMicroelectronics/LSM6DSOTR?qs=lc2O%252BfHJPVbD197C5c7oNw%3D%3D
U3: "Integrated Circuit", Manufacturer_Name="Texas Instruments", Mouser Part Number=595-TLV111733CDCYRG3, Arrow Part Number=TLV1117-33CDCYRG3, Arrow Price/Stock=https://www.arrow.com/en/products/tlv1117-33cdcyrg3/texas-instruments?region=nac, Datasheet Link=https://www.ti.com/lit/gpn/tlv1117, Height=1.8mm, Manufacturer_Part_Number=TLV1117-33CDCYRG3, Mouser Price/Stock=https://www.mouser.co.uk/ProductDetail/Texas-Instruments/TLV1117-33CDCYRG3?qs=YdQ7Kj7W0bz83qTpELrgpA%3D%3D
U4: "Integrated Circuit", Manufacturer_Name=U-Blox, Mouser Part Number=377-ZOE-M8Q-0, Datasheet Link=https://www.u-blox.com/sites/default/files/ZOE-M8_DataSheet_%28UBX-16008094%29-3.pdf, Height=1.165mm, Manufacturer_Part_Number=ZOE-M8Q-0, Mouser Price/Stock=https://www.mouser.co.uk/ProductDetail/u-blox/ZOE-M8Q-0?qs=zW32dvEIR3tuFb40SAB5GQ%3D%3D
U5: "Integrated Circuit", Manufacturer_Name="TE Connectivity", Mouser Part Number=824-MS561101BA03-50, Arrow Part Number=MS561101BA03-50, Arrow Price/Stock=https://www.arrow.com/en/products/ms561101ba03-50/te-connectivity?region=europe, Datasheet Link=http://www.te.com/usa-en/search.html?q=ms5611&source=header, Manufacturer_Part_Number=MS561101BA03-50, Mouser Price/Stock=https://www.mouser.co.uk/ProductDetail/Measurement-Specialties/MS561101BA03-50?qs=%252BgKeJhng5iV%252BnCz6Qd5iDw%3D%3D
U6: "Integrated Circuit", Manufacturer_Name=Winbond, Mouser Part Number=454-W25Q128JVFIQ, Arrow Part Number=W25Q128JVFIQ, Arrow Price/Stock=https://www.arrow.com/en/products/w25q128jvfiq/winbond-electronics?region=nac, Datasheet Link=https://www.winbond.com/hq/search-resource-file.jsp?partNo=W25Q128JVFIQ&type=datasheet, Height=2.64mm, Manufacturer_Part_Number=W25Q128JVFIQ, Mouser Price/Stock=https://www.mouser.co.uk/ProductDetail/Winbond/W25Q128JVFIQ?qs=qSfuJ%252Bfl%2Fd5tMgdyd2Kaog%3D%3D
U7: "Integrated Circuit", Manufacturer_Name="Silicon Labs", Mouser Part Number=634-CP2102NA02GQFN24, Arrow Part Number=CP2102N-A02-GQFN24, Arrow Price/Stock=https://www.arrow.com/en/products/cp2102n-a02-gqfn24/silicon-labs, Datasheet Link=https://componentsearchengine.com/Datasheets/1/CP2102N-A02-GQFN24.pdf, Height=0.8mm, Manufacturer_Part_Number=CP2102N-A02-GQFN24, Mouser Price/Stock=https://www.mouser.co.uk/ProductDetail/Silicon-Labs/CP2102N-A02-GQFN24?qs=u16ybLDytRYKabtL%2FE7DZA%3D%3D

## Free pads (board coordinates)
  round 60 hole 150 unplated mask+10: 2(200,200) 2(200,3340) 2(3340,200) 2(3340,3340)

## Via types
v1: diameter 24, hole 12, Top Layer to Bottom Layer, tented both sides, 180 vias
v2: diameter 24, hole 12, Top Layer to Bottom Layer, 2 vias

## Nets (pads, with @x,y where several pads share a name; then routed paths per layer and width w, separated by ;. In a path a pad name is that pad's centre, name@x,y a point inside that pad or via, vN(x,y) a via of type N, cw(c..) or ccw(c..) an arc to the next point about the centre after c; other vN are vias at no path point)
3V3: C1.2 C2.2 C3.2 C5.2 C6.2 C9.2 C10.2 C12.2 J1.01 J4.02 J6.7 J7.4 R1.2 R2.2 R3.2 R7.1 R8.1 R11.2 R12.2 U1.2 U2.5 U2.8 U3.2 U3.4 U4.H9 U4.J1 U4.J2 U5.1 U5.2 U6.1 U6.2 U6.3 U7.5 U7.6 U7.7 | length 3550.6
  Top Layer w6: v1(676,2188) 703.69,2215.69 726.25,2215.69 C3.2 848.54,2228.44 U3.2 ; v1(698,276) R11.2 ; v1(830,2769) R12.2 ; C10.2 1034.46,923.44 C9.2 1037.43,924.44 1063.02,898.85 U7.6 ; v1(985,834) 1002.94,816.06 U7.7 1046.13,816.06 1049.03,818.96 1049.03,822.42 1056.65,830.04 1060.11,830.04 1063.02,832.94 U7.6 ; U7.5 U7.6 ; v1(1301.22,3152.6) 1303.22,3152.6 1338.36,3187.74 U4.J2 U4.J1 ; U4.H9 1388.57,3021.43 v1(1429,2981) ; v1(1412,2039) 1412,1984.56 C5.2 1498.43,1983.56 U5.1 U5.2 ; R8.1 1627,3012 v1(1658,2981) ; v1(1677,2335) 1715,2297 R2.2 ; v1(1742,1653) 1797.56,1653 C1.2 1799.97,1652.56 1817.45,1670.04 1817.45,1743.22 1810.35,1750.32 U2.5 ; v1(1784,2113) 1784,2109.21 1789.28,2103.93 1789.28,2061.28 1800.06,2050.5 R3.2 ; U2.8 1799.53,1897.06 C2.2 1795.59,1902.97 1823.94,1931.32 1838.32,1931.32 v1(1841,1934) ; R1.2 1804,2297 v1(1842,2335) ; J6.7 1812,733.6 1899,820.6 v1(1899,1010) ; v1(1927,2174) 1988.42,2174 U1.2 ; v1(2228,847) 2228.06,846.94 2228.06,321.58 J7.4 ; v1(2235,3027) 2171.44,3027 C6.2 2171.97,3025.56 2251.53,2946 U6.2 ; U6.3 U6.2 ; U6.1 U6.2 ; R7.1 2879.31,2646.78 2879.31,2682.83 v1(2900,2703.53)
  Top Layer w10: J1.01@534.92,815 J1.01@536.92,813
  Top Layer w20: J1.01@536.92,813 v1(635,813) ; C12.2 1217.03,2123.56 1175.58,2165.01 1131.46,2165.01 1107.02,2189.46 U3.4 1108.02,2217 v1(1219,2217)
  Bottom Layer w10: v1(2900,2703.53) 2994.61,2703.53 J4.02@3006.08,2715
5V: D1.1 J5.1 U3.3 U7.8 | length 2437.2
  Top Layer w6: v1(763,2127.45) U3.3 ; v1(764,1023) 764,797.53 D1.1@765.16,796.37 ; v1(884,1376) 884,1376.5 988,1480.5 v1(988,1481) ; U7.8 D1.1@765.16,796.37 ; J5.1 1112.55,402.17 1112.55,410.59 765.53,792.06 765.53,794.55 D1.1 D1.1@765.16,796.37
  Bottom Layer w6: v1(763,2127.45) 988,1902.45 v1(988,1481) ; v1(764,1023) 764,1256 v1(884,1376)
D_N: D2.1 J5.2 U7.4 | length 738.3
  Top Layer w6: U7.4 1102.39,870.9 1124.83,893.34 1124.83,898.31 1105,918.14 v1(1105,922) ; D2.1 1139.32,487.66 1148.61,478.36 1148.61,454.73 1141,440.97 v1(1141,436) 1143.87,433.13 1143.87,402.17 J5.2
  Bottom Layer w6: v1(1105,922) 1107.41,919.59 1120.29,919.59 1148.61,891.27 1148.61,648.01 1150,646.63 1150,448.51 1141,439.51 v1(1141,436)
D_P: D2.2 J5.3 U7.3 | length 796
  Top Layer w6: U7.3 1122.85,844.39 1122.85,868.74 1142.95,888.84 1142.95,930.64 1128.85,944.74 v1(1128.85,946.23) ; J5.3 1168.13,402.17 1168.13,433.13 v1@1171,436 ; D2.2 1178.68,487.66 1166.03,475 1166,445.89 1166,439.52 1169.52,436 v1(1175,436) ; v1@1168.13,436 v1@1171,436 ; v1@1168.13,436 v1@1171,436 ; v1@1168.13,436 v1(1175,436) ; v1@1171,436 v1(1175,436)
  Bottom Layer w6: v1(1128.85,946.23) 1131.41,943.67 1131.41,931.1 1164.61,897.9 1164.61,654.64 1166,653.25 1166,448.51 1175,439.51 v1(1175,436)
DCDC_OUT: L1.1 U4.H1 | length 162.8
  Top Layer w6: L1.1 1263.97,3177.6 1299.58,3177.6 1347.71,3225.74 1376.48,3225.74 1387.69,3214.53 1387.69,3208.31 U4.H1
DTR: Q2.2 R9.1 U7.23 | length 1365.8
  Top Layer w6: Q2.2@969.69,1593.6 893.81,1593.6 777.94,1709.47 R9.1 774,1380.47 1218.73,935.74 1218.73,804.76 1211.12,797.15 1189.78,797.15 U7.23
EN: C11.2 J6.6 Q1.3 R11.1 S0.4 U1.3 | length 3958
  Top Layer w6: S0.4 589.62,406.53 R11.1 C11.2 815.44,544.44 v1(857,586) ; v1(1004.53,611.4) 1004.86,611.07 1323.93,611.07 v1(1324.26,610.74) ; Q1.3 1070.46,1851.6 1231.06,1691 v1(1596,1691) ; v1(1703,1368) 1703,1364.21 1712,1355.21 J6.6 ; v1(1928.41,2119.41) 1989.89,2119.41 U1.3
  PWR w6: v1(1596,1691) 1631,1726 1631,1822 v1(1928.41,2119.41)
  Bottom Layer w6: v1(857,586) 882.4,611.4 v1(1004.53,611.4) ; v1(1324.26,610.74) 1703,989.47 v1(1703,1368) 1596,1475 v1(1596,1691)
GND: ANT1.1 ANT1.2 ANT1.3 C1.1 C2.1 C3.1 C4.1 C5.1 C6.1 C7.1 C8.1 C9.1 C10.1 C11.1 C12.1 D1.2 D2.3 J1.02 J1.03 J1.04 J1.05 J1.06 J1.07 J1.08 J1.09 J1.10 J1.11 J1.12 J1.13 J1.14 J1.15 J1.16 J1.17 J1.18 J1.19 J1.20 J1.21 J1.22 J1.23 J1.24 J1.25 J1.26 J1.27 J1.28 J1.29 J1.30 J1.31 J1.32 J1.33 J1.34 J1.35 J1.36 J1.37 J1.38 J1.39 J1.40 J2.01 J2.02 J2.03 J2.04 J2.05 J2.06 J2.07 J2.08 J2.09 J2.10 J2.11 J2.12 J2.13 J2.14 J2.15 J2.16 J2.17 J2.18 J2.19 J2.20 J2.21 J2.22 J2.23 J2.24 J2.25 J2.26 J2.27 J2.28 J2.29 J2.30 J2.31 J2.32 J2.33 J2.34 J2.35 J2.36 J2.37 J2.38 J2.39 J2.40 J3.01 J3.02 J3.03 J3.04 J3.05 J3.06 J3.07 J3.08 J3.09 J3.10 J3.11 J3.12 J3.13 J3.14 J3.15 J3.16 J3.17 J3.18 J3.19 J3.20 J3.21 J3.22 J3.23 J3.24 J3.25 J3.26 J3.27 J3.28 J3.29 J3.30 J3.31 J3.32 J3.33 J3.34 J3.35 J3.36 J3.37 J3.38 J3.39 J3.40 J4.04 J4.06 J4.08 J4.10 J4.12 J4.14 J4.16 J4.18 J4.20 J4.22 J4.24 J4.25 J4.26 J4.27 J4.28 J4.29 J4.30 J4.31 J4.32 J4.33 J4.34 J4.35 J4.36 J4.37 J4.38 J4.39 J4.40 J5.5 J6.8 J7.6 R4.2 R13.2 S0.1 S1.1 U1.1 U1.15 U1.38 U1.39 U1.40 U1.41 U1.42 U1.43 U1.44 U1.45 U1.46 U1.47 U2.1 U2.2 U2.3 U2.6 U2.7 U3.1 U4.A1 U4.A3 U4.A5 U4.A7 U4.A8 U4.A9 U4.B9 U4.C1 U4.C7 U4.C9 U4.D3 U4.D6 U4.D9 U4.E1 U4.E3 U4.E7 U4.F7 U4.G3 U4.G6 U4.G7 U4.J3 U4.J9 U5.3 U5.4 U6.10 U7.2 U7.25 | length 1862.3
  Top Layer w6: S0.1 S0.1@306,591.63 ; S1.1@690.2,3198.74 S1.1 ; C11.1 698,680.21 705,687.21 v1(705,691) 705,794.53 D1.2 ; C3.1@737.03,2283.56 C3.1 ; U3.1@843.24,2308.55 U3.1 ; C10.1@944.56,979 C10.1 C10.1@945.56,979.12 ; U7.25 1141.76,766.84 U7.2 1142.54,844.39 1142.54,865.73 1158.39,881.59 1161.44,881.59 ; 1339.34,3049.94 U4.J9 ; U4.J3 U4.G3 1409.15,3168.94 1409.15,3172.21 1409.63,3172.7 1409.63,3175.64 1420.36,3186.37 1447.63,3186.37 ; U4.G6 U4.G7 U4.F7 U4.E7 1467.31,3089.31 ; C5.1@1412,1927.44 C5.1 1457.8,1928.44 1494.85,1891.39 U5.3 U5.4 ; 1447.63,3233 U4.E1 1447.63,3186.37 ; 1467.31,3024.01 U4.D9 U4.C9 U4.B9 ; U4.D6 1467.31,3089.31 ; U4.C1@1486.11,3203.27 1485.63,3202.78 1485.63,3199.84 1467.31,3181.52 U4.D3 U4.E3 1447.63,3186.37 ; U4.C1 1487,3233 ; 1506.68,3021.43 U4.B9 ; U4.A3@1525.48,3167.17 U4.A3 1570.25,3168.06 ; 1526.37,3024.01 U4.A9 ; U4.A5@1526.37,3129.57 U4.A5 1569.36,3128.69 1570.25,3129.57 ; U4.A1 1526.37,3233 ; v1(1725,1957) 1740.47,1941.53 C2.1 ; U2.6@1810.35,1770 U2.6 1806.43,1769.5 1844.5,1769.5 v1(1845,1769) ; ANT1.1 1853.6,3153.19 ANT1.1@1860.44,3146.35 ; ANT1.2 ANT1.2@1891,3133.54 ; U1.15@1987.48,1517 U1.15 ; U1.1 U1.1@2006.17,2206.25 ; C6.1@2168,2968.44 C6.1 ; U1.38 2692.24,2220.97 2730.32,2259.05 2730.32,2268.32 v1(2733,2271) ; R4.2@2687.47,581 R4.2 ; U6.10 U6.10@2725.65,2696 ; R13.2@2880.47,581 R13.2 ; J2.40@3006.08,2715 v1(3006.08,2813) ; 1467.31,3089.31 U4.C7 U4.A7 U4.A8 U4.A9 ; U4.B9 U4.A9
  Top Layer w10: U1.47 U1.39 ; U1.41 U1.39 ; U1.45 U1.39 ; U1.43 U1.39
  Bottom Layer w10: J4.06@3004.08,2513 J4.06@3006.08,2515 ; J4.40@3005.08,816 J4.40@3006.08,815
  other v1: 400,200 900,400 1500,400 1700,400 1900,400 3100,400 3300,400 800,600 1400,600 2600,600 2800,600 3000,600 3200,600 2900,800 2712.82,812.82 800,1000 1200,1000 1400,1000 1800,1000 2200,1000 2400,1000 2600,1000 2800,1000 700,1200 900,1200 1500,1200 2100,1200 2300,1200 2700,1200 2900,1200 800,1400 1000,1400 1200,1400 1600,1400 2200,1400 2600,1400 2800,1400 700,1600 1100,1600 1500,1600 1700,1600 2100,1600 2300,1600 2500,1600 2900,1600 1200,1800 1400,1800 2200,1800 2400,1800 2600,1800 700,2000 1100,2000 2900,2000 1400,2200 1600,2200 2200,2200 2400,2200 700,2400 900,2400 1100,2400 1500,2400 1700,2400 1900,2400 2100,2400 2300,2400 2700,2400 2900,2400 800,2600 1000,2600 2000,2600 2200,2600 2400,2600 2600,2600 300,2800 500,2800 700,2800 1100,2800 1900,2800 2100,2800 2900,2800 3100,2800 400,3000 600,3000 1200,3000 1800,3000 2000,3000 3200,3000 300,3200 500,3200 1100,3200 2100,3200 2300,3200 2500,3200 2700,3200 2900,3200 3100,3200 3300,3200
HCLK: J7.5 U1.13 | length 1588.5
  Top Layer w6: U1.13 1976.73,1606.25 1908.88,1606.25 1808.81,1506.19 1808.81,1257.81 2184.75,881.88 2184.75,321.58 J7.5
HCS: J7.2 U1.9 | length 1778.7
  Top Layer w6: v1(1923,1820.97) U1.9 ; v1(1982,1165) 2327.42,819.58 J7.2
  Bottom Layer w6: v1(1923,1820.97) 1886,1783.97 1886,1261 v1(1982,1165)
HMISO: J7.7 U1.8 | length 1758.4
  Top Layer w6: v1(1870,1155) 1873,1155 2110.88,917.12 J7.7 ; v1(1923,1874) 1988.42,1874 U1.8
  Bottom Layer w6: v1(1870,1155) 1870,1821 v1(1923,1874)
HMOSI: J7.3 U1.16 | length 1337.2
  Top Layer w6: U1.16 1986.92,1466.44 1956.44,1466.44 1948,1458 1948,1163 2284.11,826.89 J7.3
IO0: J6.5 Q2.3 U1.25 | length 3067.7
  Top Layer w6: Q2.3@1056.31,1631 Q2.3@1066.15,1631 ; v1(1664,1521) 1554,1631 Q2.3@1066.15,1631 ; J6.5 1712,733.6 1666.19,779.41 1666.19,912.75 1468.94,1110 1408,1110 1074.96,1443.04 1074.96,1622.19 Q2.3@1066.15,1631 ; U1.25 v1(2750,1570.97)
  PWR w6: v1(1664,1521) 1873.03,1521 v1(1923,1570.97)
  Bottom Layer w6: v1(1923,1570.97) v1(2750,1570.97)
IO27: U1.12 U6.7 | length 1278.4
  Top Layer w6: v1(1923,1670.97) U1.12 ; v1(2246,2639) 2249.35,2639 2306.35,2696 U6.7
  PWR w6: v1(1923,1670.97) 2246,1993.97 v1(2246,2639)
LED1: LED1.2 U1.10 | length 1849.6
  Top Layer w6: U1.10 U1.10@2003.26,1770.97 ; U1.10@2011,1769 2011,1763.23 2017.98,1756.25 2023.75,1756.25 2487,1293 2487,1074 2953,608 2953,516.77 2907.54,471.32 2907.54,376.09 2890.86,359.4 LED1.2
LED2: LED2.2 U1.11 | length 1708.8
  Top Layer w6: U1.11 2006.17,1706.25 2047.75,1706.25 2471,1283 2471,1019.29 2724,766.29 2724,389.23 2696.14,361.37 LED2.2
NetC8_2: C8.2 L2.2 R8.2 | length 174.4
  Top Layer w6: R8.2 1727.91,3094.83 C8.2 L2.2
NetLED1_1: LED1.1 R13.1 | length 270.5
  Top Layer w6: LED1.1@2873.14,284.6 2840.46,317.28 2840.46,485.87 2877.06,522.47 R13.1
NetLED2_1: LED2.1 R4.1 | length 272.4
  Top Layer w6: LED2.1@2676.46,282.63 2645.74,313.35 2645.74,484.15 2684.06,522.47 R4.1
NetQ1_1: Q1.1 R9.2 | length 249.9
  Top Layer w6: R9.2 816.12,1768.53 927.78,1880.19 965.19,1880.19 Q1.1
NetQ2_1: Q2.1 R10.2 | length 122.5
  Top Layer w6: R10.2 866.94,1706.47 905.01,1668.4 Q2.1@969.69,1668.4
NetR3_1: R3.1 U2.12 | length 321.7
  Top Layer w6: U2.12 1729.65,1789.68 1690,1829.33 1690,1966.05 1715.39,1991.44 R3.1
NetR7_2: R7.2 U6.9 | length 112.2
  Top Layer w6: U6.9 2799.47,2646 R7.2
RF_IN: ANT1.4 L2.1 U4.A4 | length 395
  Top Layer w7.27: U4.A4 1598.21,3148.37 1652.75,3202.91 L2.1 1803.88,3202.91 1817,3216.04 1885.24,3216.04 ANT1.4
RST_GPS: C4.2 R12.1 S1.4 U4.J6 | length 710.3
  Top Layer w6: R12.1 961.53,2870.03 C4.2 959.56,3040.93 S1.4 1145.13,3041.26 1181.47,3077.6 1328.6,3077.6 1360,3109 U4.J6
RTS: Q1.2 R10.1 U7.19 | length 1383
  Top Layer w6: R10.1 v1@915,1765.53 ; v1@915.49,1765.53 964.16,1814.2 Q1.2 ; U7.19 1199.83,717.63 1218.78,698.68 1228.64,698.68 v1(1231.31,696)
  Bottom Layer w6: v1(915,1766) 915,1389.16 1231.31,1072.84 1231.31,1067.87 1230,760.11 ccw(c1255,760) 1230.01,759.48 v1(1231.31,696)
RX: J6.3 R5.1 U1.34 | length 2731.8
  Top Layer w6: v1(1465,1010) 1467.68,1007.32 1471.62,1007.32 1550,928.94 1550,795.6 1612,733.6 J6.3 ; v1(1530,1346.53) 1597.53,1346.53 R5.1 1628,1348 1894,1614 1894,2140 v1(1893,2141) ; U1.34 2682.46,2023 v1(2750,2023)
  Bottom Layer w6: v1(1465,1010) 1530,1075 v1(1530,1346.53) ; v1(1893,2141) 1894.15,2139.85 1894.15,2118.32 1989.47,2023 v1(2750,2023)
RX_GPS: J6.1 U4.J4 | length 2729.5
  Top Layer w6: v1(1259,3109) 1277.6,3127.6 1313.6,3127.6 1334.37,3148.37 U4.J4 ; v1(1365,697) 1511,697 J6.1
  Bottom Layer w6: v1(1259,3109) 1289,3079 1289,773 v1(1365,697)
RXD: R6.2 U7.20 | length 674.6
  Top Layer w6: U7.20 1231.31,737.31 1254,760 v1(1255,760) ; v1(1263,1291) 1322.47,1291 R6.2
  Bottom Layer w6: v1(1255,760) 1254,784 1254,1277.13 1263,1286.13 v1(1263,1291)
SCL: J4.09 R2.1 U1.36 U2.13 U4.B1 U5.8 | length 4267.4
  Top Layer w6: U4.B1 1506.68,3243.69 v1(1538,3275) ; U5.8 1591.31,2037.31 v1(1715,2161) R2.1 1711.06,2214.47 1700.28,2225.25 1700.28,2229.19 1648.74,2280.74 1648.74,2507.74 v2(1649.82,2508.82) ; v1(1672,1789) 1672,1784.94 1686.94,1770 U2.13 ; U1.36 v1(2750,2121)
  PWR w6: v1(2750,2121) 2944,2315 v1(3316,2315)
  Bottom Layer w6: v1(1538,3275) 1538,3212.69 1565,3185.69 1565,2593.64 v2(1649.82,2508.82) ; v1(1672,1789) 1671.32,1789.68 1627.5,1789.68 1599.73,1761.92 1577.02,1761.92 1563.54,1775.39 1563.54,2009.54 v1(1715,2161) 1825.36,2161 1999.36,1987 2732.24,1987 2741.24,1996 2790,1996 2807,2013 2807,2064 v1(2750,2121) ; J4.09@3211,2315 v1(3316,2315)
SDA: J4.11 R1.1 U1.33 U2.14 U4.A2 U5.7 | length 4291.2
  Top Layer w6: U4.A2 1575.74,3187.74 v1(1599,3211) ; U5.7 1601.15,1940.61 1637,1976.46 1637,2048 1727,2138 1811,2138 v1(1813,2136) ; v1(1596,1800) 1596,1775.47 1621.15,1750.32 U2.14 ; v2(1755,2439) 1755,2262.47 1789.28,2228.19 1789.28,2224.25 1800.06,2213.47 R1.1 1813,2204.47 v1@1813,2138 ; U1.33@2680.46,1971 2750,1971 v1(2750.8,1970.2)
  PWR w6: v1(2750.8,1970.2) 2750.8,1971.8 2775,1996 2775,2123.37 2950.63,2299 3295.72,2299 3304.52,2290.2 3304.52,2230.27 3316,2218.79 v1(3316,2215)
  Bottom Layer w6: v1(1596,1800) 1596,2007 1727,2138 1811,2138 v1(1813,2136) ; v1(1599,3211) 1581,3193 1581,2613 v2(1755,2439) ; v1@1813,2137.2 1980,1970.2 v1(2750.8,1970.2) ; J4.11@3211,2215 v1(3316,2215)
TX: J6.4 R6.1 U1.35 | length 3007
  Top Layer w6: R6.1 R6.1@1329.94,1346.53 ; v1(1377,1346.53) R6.1@1329.94,1346.53 ; v1(1465,1072) 1590,947 1590,882.96 J6.4 ; v1(1865,2272.53) 1842,2249.53 1842,1971 1878,1935 1878,1625.59 1686.8,1434.39 1417.8,1434.39 R6.1@1329.94,1346.53 ; U1.35 v1(2750,2070.97)
  Bottom Layer w6: v1(1377,1346.53) 1465,1258.53 v1(1465,1072) ; v1(1865,2272.53) 2548.44,2272.53 v1(2750,2070.97)
TX_GPS: J6.2 U4.J5 | length 2472.4
  Top Layer w6: v1(1312.41,3102.6) 1338.49,3128.69 U4.J5 ; v1(1377,860) 1511.04,860 J6.2
  Bottom Layer w6: v1(1312.41,3102.6) 1312,3102.19 1312,925 v1(1377,860)
TXD: R5.2 U7.21 | length 804.9
  Top Layer w6: U7.21 1189.78,757.78 1211.12,757.78 1340,886.66 v1(1340,947) ; v1(1377,1218) 1447.94,1288.94 R5.2
  PWR w6: v1@1375.5,1219.5 v1(1377,1218)
  Bottom Layer w6: v1(1340,947) 1340,1181 v1(1377,1218)
V_CORE: C7.2 L1.2 U4.G1 | length 271.8
  Top Layer w6: C7.2 1170.44,3212 L1.2 1309.6,3212 1339.34,3241.74 1383.1,3241.74 1407.37,3217.47 1407.37,3208.31 U4.G1
VCLK: J4.01 U1.30 U6.16 | length 2123.2
  Top Layer w6: U1.30 2756.97,1820.97 2815,1879 v1(2815,2422) ; U6.16 3041,2996 v1(3135,2902)
  Bottom Layer w6: v1(2815,2422) 2815,2703.53 2870.41,2758.94 3127,2758.94 3170.94,2715 3211,2715 3190.6,2715 3166.16,2739.44 3166.16,2870.84 v1(3135,2902)
VCS: J4.07 U1.29 | length 1023
  Top Layer w6: U1.29 v1(2750,1770.97)
  Bottom Layer w6: v1(2750,1770.97) 2776.97,1770.97 2839,1833 2839,2151.25 2967.31,2279.56 3083.62,2279.56 3127.39,2323.33 3127.39,2361.79 3185.6,2420 J4.07
VMISO: J4.03 U1.31 U6.8 | length 1959.6
  Top Layer w6: v1(2330.57,2585) U6.8 ; U1.31 v1(2750,1870.97)
  Bottom Layer w6: v1(2330.57,2585) 2773,2142.57 ; v1(2750,1870.97) 2823,1943.97 2823,2093 2822.57,2093 2773,2142.57 ; J4.03 3124.06,2620 3088.62,2655.44 2943.19,2655.44 2855.6,2567.84 2855.6,2225.16 2773,2142.57
VMOSI: J4.05 U1.37 U6.15 | length 1827.3
  Top Layer w6: U1.37 2763.65,2170.97 v1(2772.95,2180.26) ; U6.15 3045,2946 3123,2868 3221,2868 3316,2773 v1(3316,2515)
  PWR w6: v1(2772.95,2180.26) 3107.68,2515 v1(3316,2515)
  Bottom Layer w6: J4.05@3211,2515 v1(3316,2515)
pads on no net: J4.13 J4.15 J4.17 J4.19 J4.21 J4.23 J5.4 J5.6 J5.7 J5.8 J5.9 J5.10 J5.11 J6.9 J6.10 J7.1 J7.8 J7.9 J7.10 J7.11 J7.12 J7.13 J7.14 J7.15 S0.2 S0.3 S1.2 S1.3 U1.4 U1.5 U1.6 U1.7 U1.14 U1.17 U1.18 U1.19 U1.20 U1.21 U1.22 U1.23 U1.24 U1.26 U1.27 U1.28 U1.32 U2.4 U2.9 U2.10 U2.11 U4.A6 U4.C3 U4.C4 U4.C5 U4.C6 U4.D1 U4.D4 U4.E9 U4.F1 U4.F3 U4.F4 U4.F6 U4.F9 U4.G4 U4.G5 U4.G9 U4.J7 U4.J8 U5.5 U5.6 U6.4 U6.5 U6.6 U6.11 U6.12 U6.13 U6.14 U7.1 U7.9 U7.10 U7.11 U7.12 U7.13 U7.14 U7.15 U7.16 U7.17 U7.18 U7.22 U7.24

## Polygon pours and split planes (outlines as drawn)
3V3 on PWR "3V3_PWR" (solid, pour order 2): 0,3470 cw(c70,3470) 70,3540 330,3540 495,3375 3045,3375 3210,3540 3471,3540 cw(c3471,3471) 3540,3471 3540,3210 3375,3045 3375,495 3540,330 3540,70 cw(c3470,70) 3470,0 3210,0 3045,165 495,165 330,0 70,0 cw(c70,70) 0,70 0,330 165,495 165,3045 0,3210
GND on GND "GND_L03_P003" (solid, pour order 3): 0,3470 cw(c70,3470) 70,3540 330,3540 495,3375 3045,3375 3210,3540 3471,3540 cw(c3471,3471) 3540,3471 3540,3210 3375,3045 3375,495 3540,330 3540,70 cw(c3470,70) 3470,0 3210,0 3045,165 495,165 330,0 70,0 cw(c70,70) 0,70 0,330 165,495 165,3045 0,3210
GND on Top Layer "Top_GND" (solid, pour order 13): 0,3470 cw(c70,3470) 70,3540 330,3540 495,3375 3045,3375 3210,3540 3471,3540 cw(c3471,3471) 3540,3471 3540,3210 3375,3045 3375,495 3540,330 3540,70 cw(c3470,70) 3470,0 3210,0 3045,165 495,165 330,0 70,0 cw(c70,70) 0,70 0,330 165,495 165,3045 0,3210
GND on Bottom Layer "Bottom_GND" (solid, pour order 12): 0,3470 cw(c70,3470) 70,3540 330,3540 495,3375 3045,3375 3210,3540 3471,3540 cw(c3471,3471) 3540,3471 3540,3210 3375,3045 3375,495 3540,330 3540,70 cw(c3470,70) 3470,0 3210,0 3045,165 495,165 330,0 70,0 cw(c70,70) 0,70 0,330 165,495 165,3045 0,3210

## Other copper
Top Layer:
  pour cut-out: 1347.71,3226 1560,3226 1560,3029.01 1347.71,3029.01

## Silkscreen, mask and mechanical layers (free items; w line width, h text height)
Top Overlay:
  drawing of 5 lines, arcs and shapes, not listed
  text "TX" at 1449,827 h40 r90
  text "RX" at 1451,664 h40 r90
Board Outline:
  the board outline again, w4